# Altium PCB PCB.PcbDoc
Units mm, origin at the board's own origin, x right, y up, seen from the top; angles counter-clockwise.
Board outline 39.12 x 28.07 mm, 2 copper layers (Top Layer, Bottom Layer); 6 components, 12 nets, 30 pads, 0 vias.
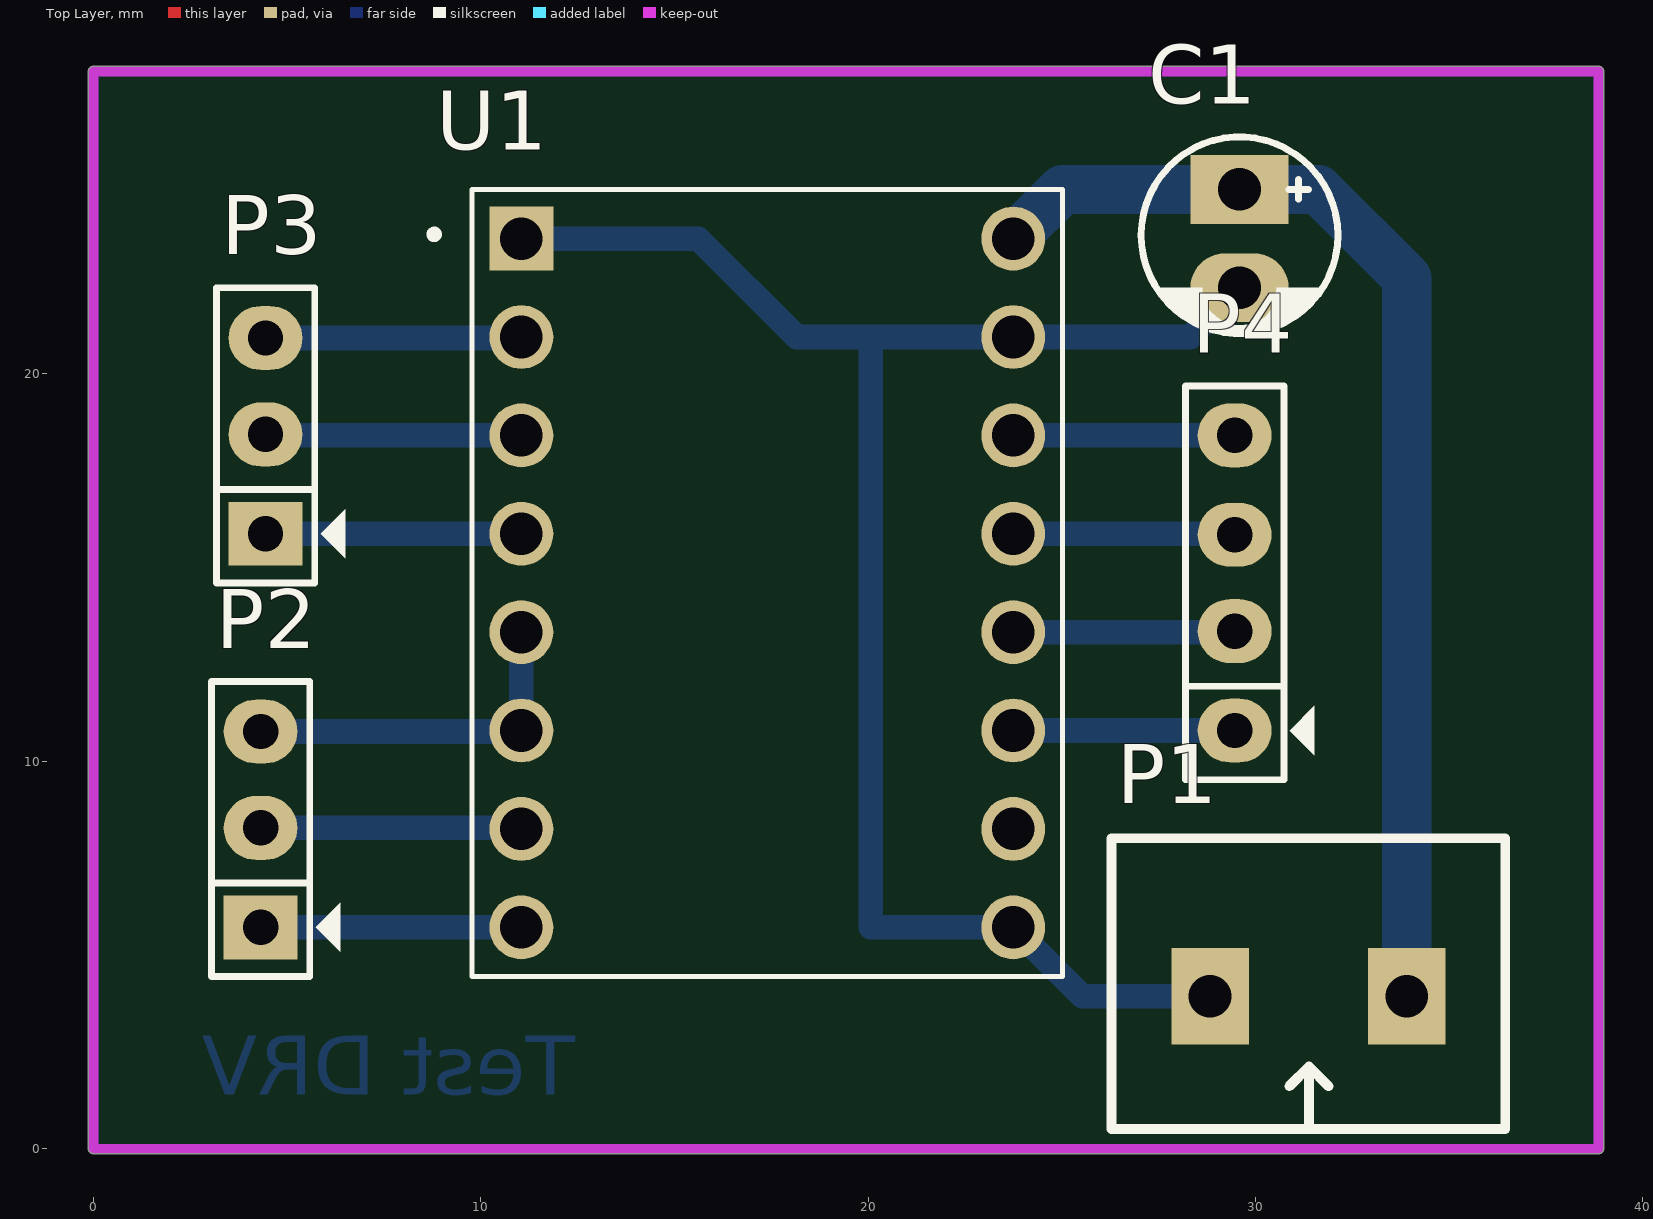
[diagram p0: Top Layer view]
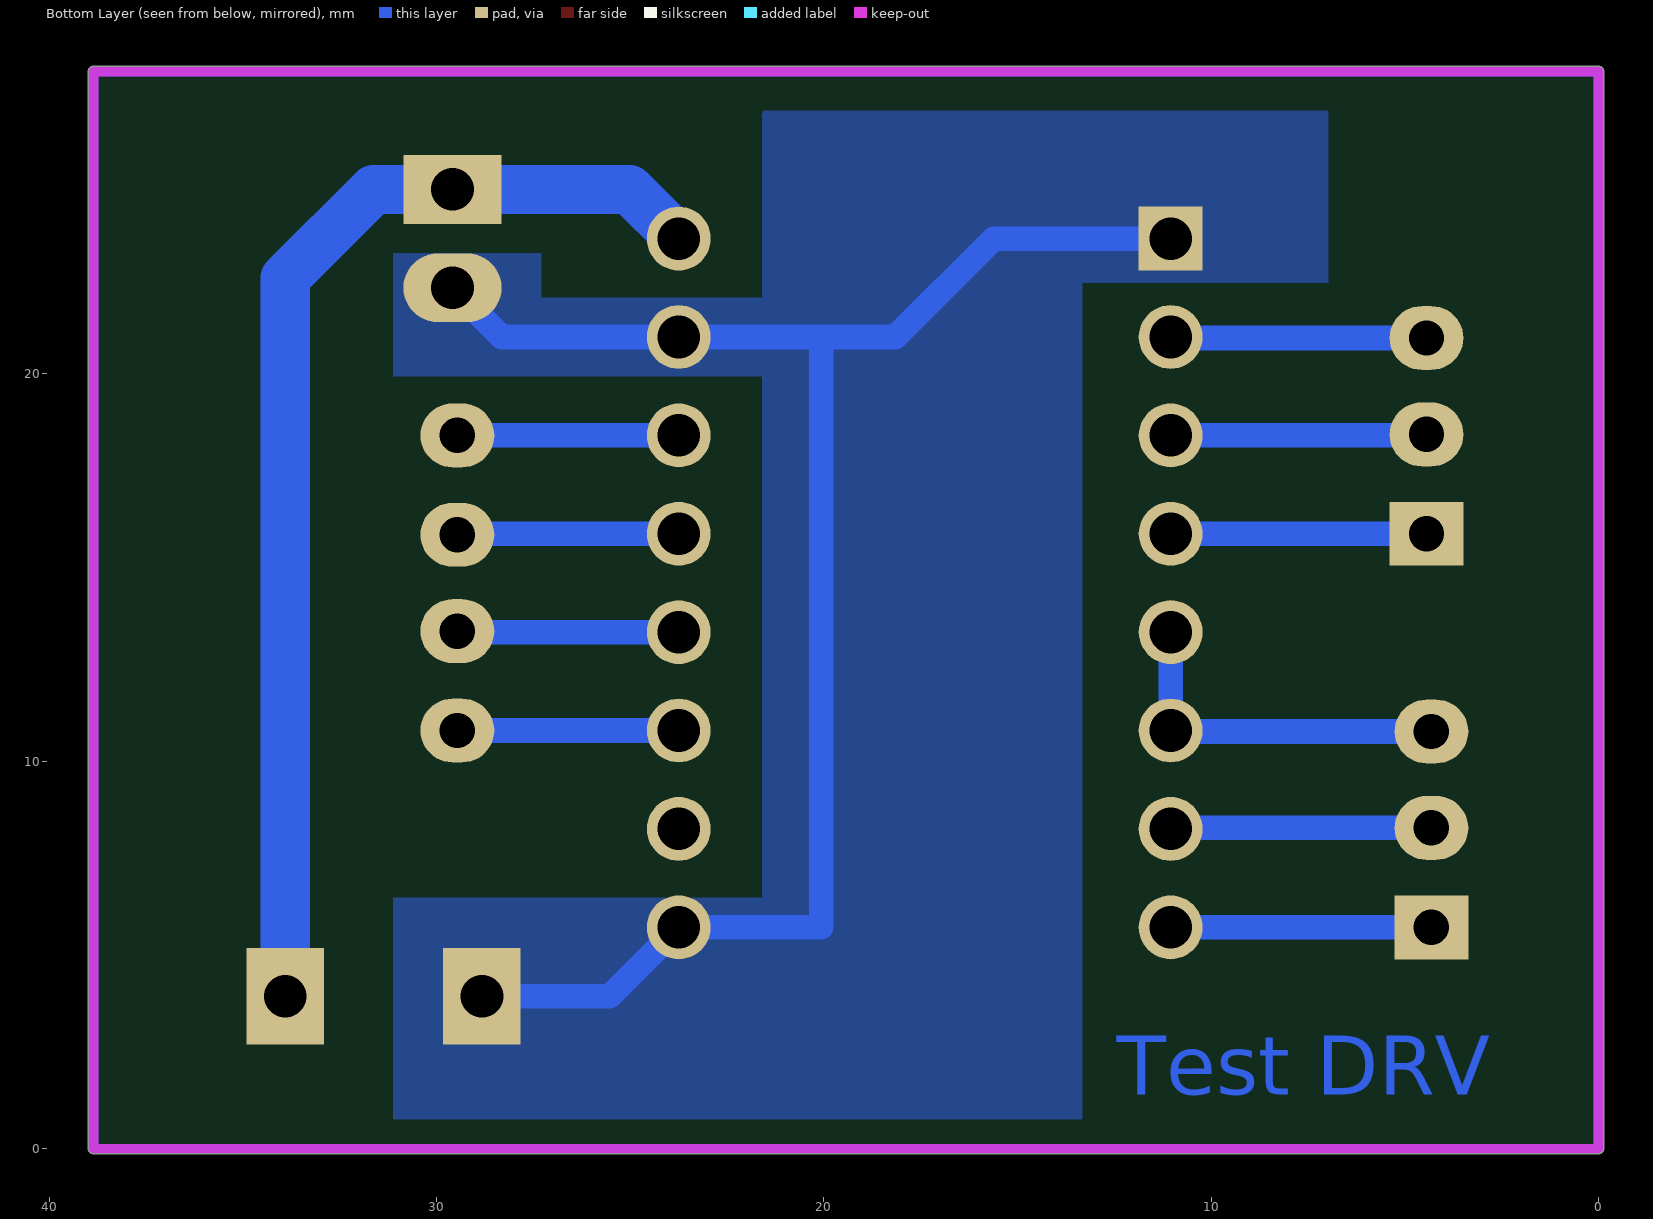
[diagram p1: Bottom Layer view, seen from below]
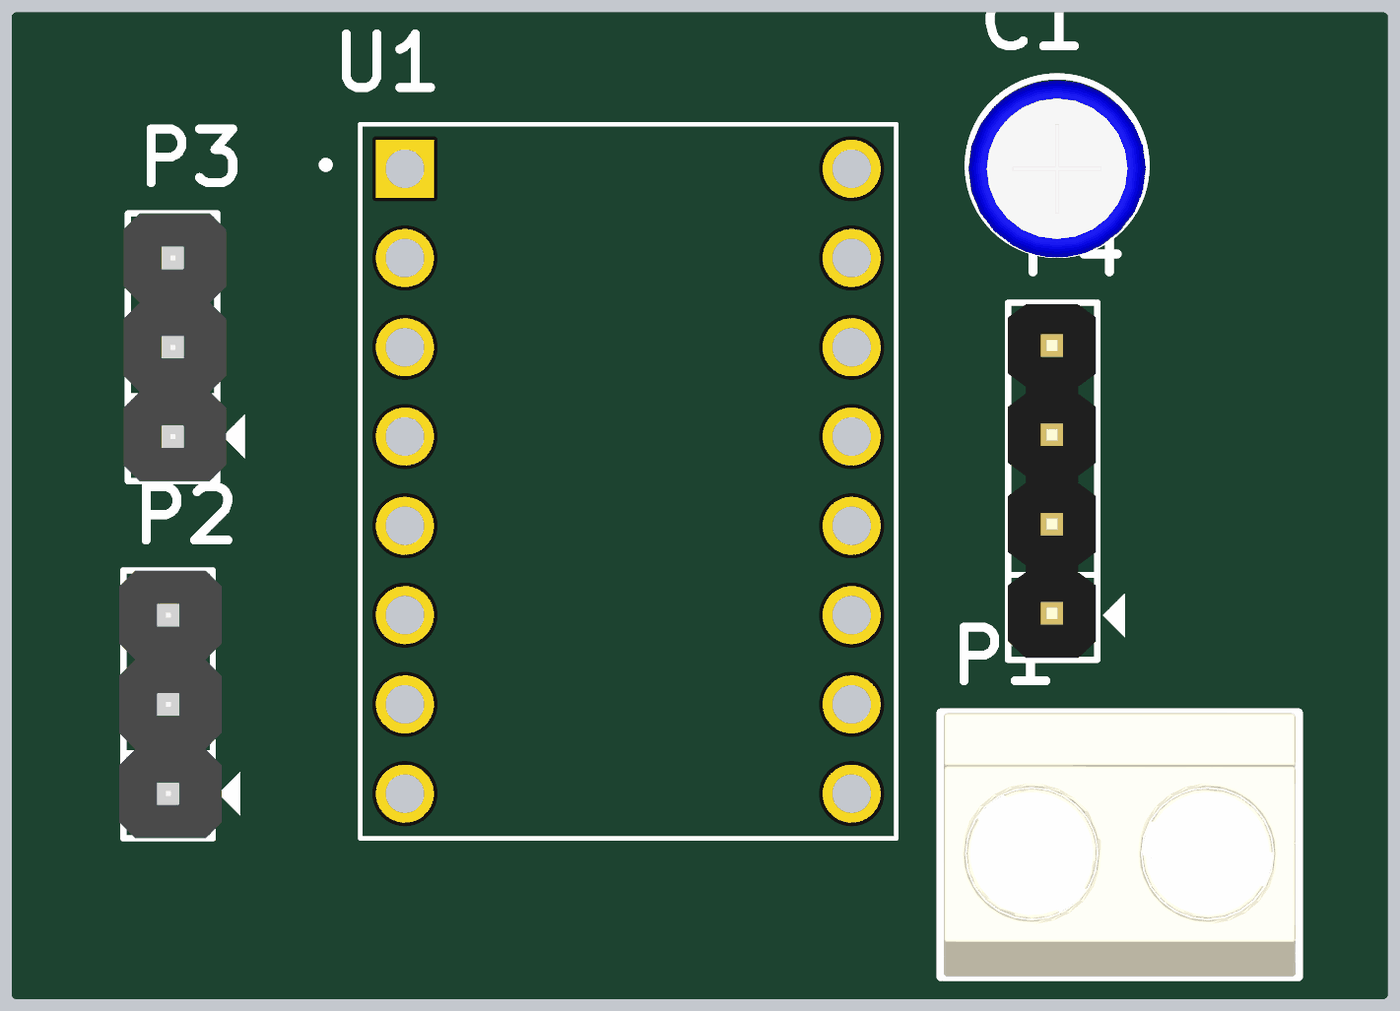
[diagram p2: 3D render of the assembled board from above, using the file's embedded part models]

## Layer stack, top to bottom
Top Solder: solder mask 0.0102, Solder Resist, Dk 3.5
Top Layer: signal copper 0.0356
Dielectric 1: dielectric 0.32, FR-4, Dk 4.8
Bottom Layer: signal copper 0.0356
Bottom Solder: solder mask 0.0102, Solder Resist, Dk 3.5

## Board outline
-0.127,0 ccw(c0,0) 0,-0.127 38.862,-0.127 ccw(c38.862,0) 38.989,0 38.989,27.813 ccw(c38.862,27.813) 38.862,27.94 0,27.94 ccw(c0,27.813) -0.127,27.813

## Design rules (kind name [scope] priority, off if disabled: settings)
Clearance [All] p1: gap=0.254
PlaneConnect [All] p1: planeconnectstyle=Direct reliefexpansion=0.508 reliefentries=4 reliefconductorwidth=0.254 reliefairgap=0.254
PolygonConnect [All] p1: connectstyle=Direct reliefconductorwidth=0.254 reliefentries=4 polygonreliefangle="90 Angle" airgapwidth=0.254
RoutingVias [All] p1: holewidth=0.711 width=1.27 viastyle="Through Hole" minholewidth=0.711 minwidth=1.27 maxholewidth=0.711 maxwidth=1.27
SolderMaskExpansion [All] p1: expansion=0.102
Width [All] p1: maxlimit=1.27 minlimit=0.254 preferedwidth=0.635
29 further rules are at their usual default settings.

## Components (designator, comment, footprint, x,y, rotation, side; value= is the part's Value field where it differs from the comment)
C1 "Cap Pol" CP1/2 29.591,24.765 r270 top
P1 "Domino 2" "DOMINO 2- 5mm" 31.369,3.937 r180 top
P2 "Header 3" JP3 4.318,8.255 r90 top
P3 "Header 3" JP3 4.445,18.415 r90 top
P4 "Header 4" JP4 29.464,13.335 r90 top
U1 "DRV8825" *IC_DRV8825_STEPPER_MOTOR_DRIVER_CARRIER 17.399,14.605 r0 top

## Footprints (in the part's own frame and the unit in brackets; to place one, negate y for a bottom-side part, rotate by r counter-clockwise, add the part's x,y. Pads: shape width x height; smd on the part's side, far side on the other; paste and mask are expansions set on the pad)
*IC_DRV8825_STEPPER_MOTOR_DRIVER_CARRIER [mm]
  rect 1.65x1.65 hole 1.1: 1(-6.35,8.89)
  round 1.65 hole 1.1: 2(-6.35,6.35) 3(-6.35,3.81) 4(-6.35,1.27) 5(-6.35,-1.27) 6(-6.35,-3.81) 7(-6.35,-6.35) 8(-6.35,-8.89) 9(6.35,-8.89) 10(6.35,-6.35) 11(6.35,-3.81) 12(6.35,-1.27) 13(6.35,1.27) 14(6.35,3.81) 15(6.35,6.35) 16(6.35,8.89)
  silkscreen extent -8.7,-10.16 7.62,10.16
CP1/2 [mm] "Tu hoa < 22uF/16>50V"
  rect 1.778x2.54 hole 1.1: 1(0,0)
  oval 1.778x2.54 hole 1.1: 2(2.54,0)
  silkscreen extent -1.35,-2.54 3.72,2.54, body extent -1.26,-2.53 3.8,2.53, height 7.29
"DOMINO 2- 5mm" [mm]
  rect 2x2.5 hole 1.1: 1(-2.54,0) 2(2.54,0)
  silkscreen extent -5.08,-4.08 5.08,3.43, body extent -5,-4.07 5,3.43, height 10
JP3 [mil] "Jumper 3"
  rect 65x75 hole 36: 1(-100,0)
  oval 65x75 hole 36: 2(1,0) 3(99,0)
  silkscreen extent -150,-81 150,50, body extent -150,-60 150,55, height 355
JP4 [mil] "Jumper 4"
  oval 65x75 hole 36: 1(-100,0) 2(1,0) 3(99,0) 4(200,0)
  silkscreen extent -150,-81 250,50, body extent -148,-48 248,50, height 323

## Part data
C1: "Polarized Capacitor (Radial)"
P1: "Domino, 2-Pin"
P2 P3: "Header, 3-Pin"
P4: "Header, 4-Pin"
U1: library part DRV8825_STEPPER_MOTOR_DRIVER_CARRIER, "DRV8825 Motor Controller/Driver Power Management Evaluation Board"

## Nets (pads, with @x,y where several pads share a name; then routed paths per layer and width w, separated by ;. In a path a pad name is that pad's centre, name@x,y a point inside that pad or via, vN(x,y) a via of type N, cw(c..) or ccw(c..) an arc to the next point about the centre after c; other vN are vias at no path point)
A1: P4.2 U1.12 | length 5.7
  Bottom Layer w0.635: U1.12 P4.2@29.439,13.335
A2: P4.1 U1.11 | length 5.7
  Bottom Layer w0.635: U1.11 P4.1
B1: P4.3 U1.13 | length 5.7
  Bottom Layer w0.635: U1.13 P4.3@29.439,15.875
B2: P4.4 U1.14 | length 5.7
  Bottom Layer w0.635: U1.14 P4.4
GND: C1.2 P1.2 U1.1 U1.9 U1.15 | length 44.9
  Bottom Layer w0.635: U1.1 15.621,23.495 18.161,20.955 20.066,20.955 ; P1.2 25.527,3.937 U1.9 20.066,5.715 20.066,20.955 ; C1.2 28.321,20.955 U1.15 20.066,20.955
NetP2_1: P2.1 U1.8 | length 6.7
  Bottom Layer w0.635: P2.1 U1.8
NetP2_2: P2.2 U1.7 | length 6.7
  Bottom Layer w0.635: P2.2 11.024,8.28 U1.7
NetP2_3: P2.3 U1.5 U1.6 | length 9.3
  Bottom Layer w0.635: P2.3 11.024,10.77 U1.6 U1.5
NetP3_1: P3.1 U1.4 | length 6.6
  Bottom Layer w0.635: P3.1 U1.4
NetP3_2: P3.2 U1.3 | length 6.6
  Bottom Layer w0.635: P3.2 4.47,18.415 U1.3
NetP3_3: P3.3 U1.2 | length 6.6
  Bottom Layer w0.635: P3.3 11.024,20.93 U1.2
VCC: C1.1 P1.1 U1.16 | length 30.2
  Bottom Layer w1.27: U1.16 25.019,24.765 C1.1 31.623,24.765 33.909,22.479 P1.1
pads on no net: U1.10
copper on no net: | length 133.3
  Bottom Layer w0.254: 0,0 0,27.813 38.862,27.813 38.862,0 0,0

## Polygon pours and split planes (outlines as drawn)
GND on Bottom Layer "GND" (solid, remove dead copper, pour order 0): 31.115,6.477 21.59,6.477 21.59,19.939 31.115,19.939 31.115,23.114 27.305,23.114 27.305,21.971 21.59,21.971 21.59,26.67 21.717,26.797 6.985,26.797 6.985,22.352 7.112,22.352 7.239,22.352 13.335,22.352 13.335,0.762 31.115,0.762

## Keep-outs
Keep-Out Layer:
  lines w0.254: 0,0 38.862,0 38.862,27.813 0,27.813 0,0

## Other copper
Bottom Layer:
  text "Test DRV" at 12.446,1.397 h1.52